# Altium PCB PCB1.PcbDoc
Units mm, origin at the board's own origin, x right, y up, seen from the top; angles counter-clockwise.
Board outline 92.84 x 57.15 mm, 2 copper layers (Top Layer, Bottom Layer), stack 1.571 mm thick; 25 components, 56 nets, 116 pads, 17 vias.
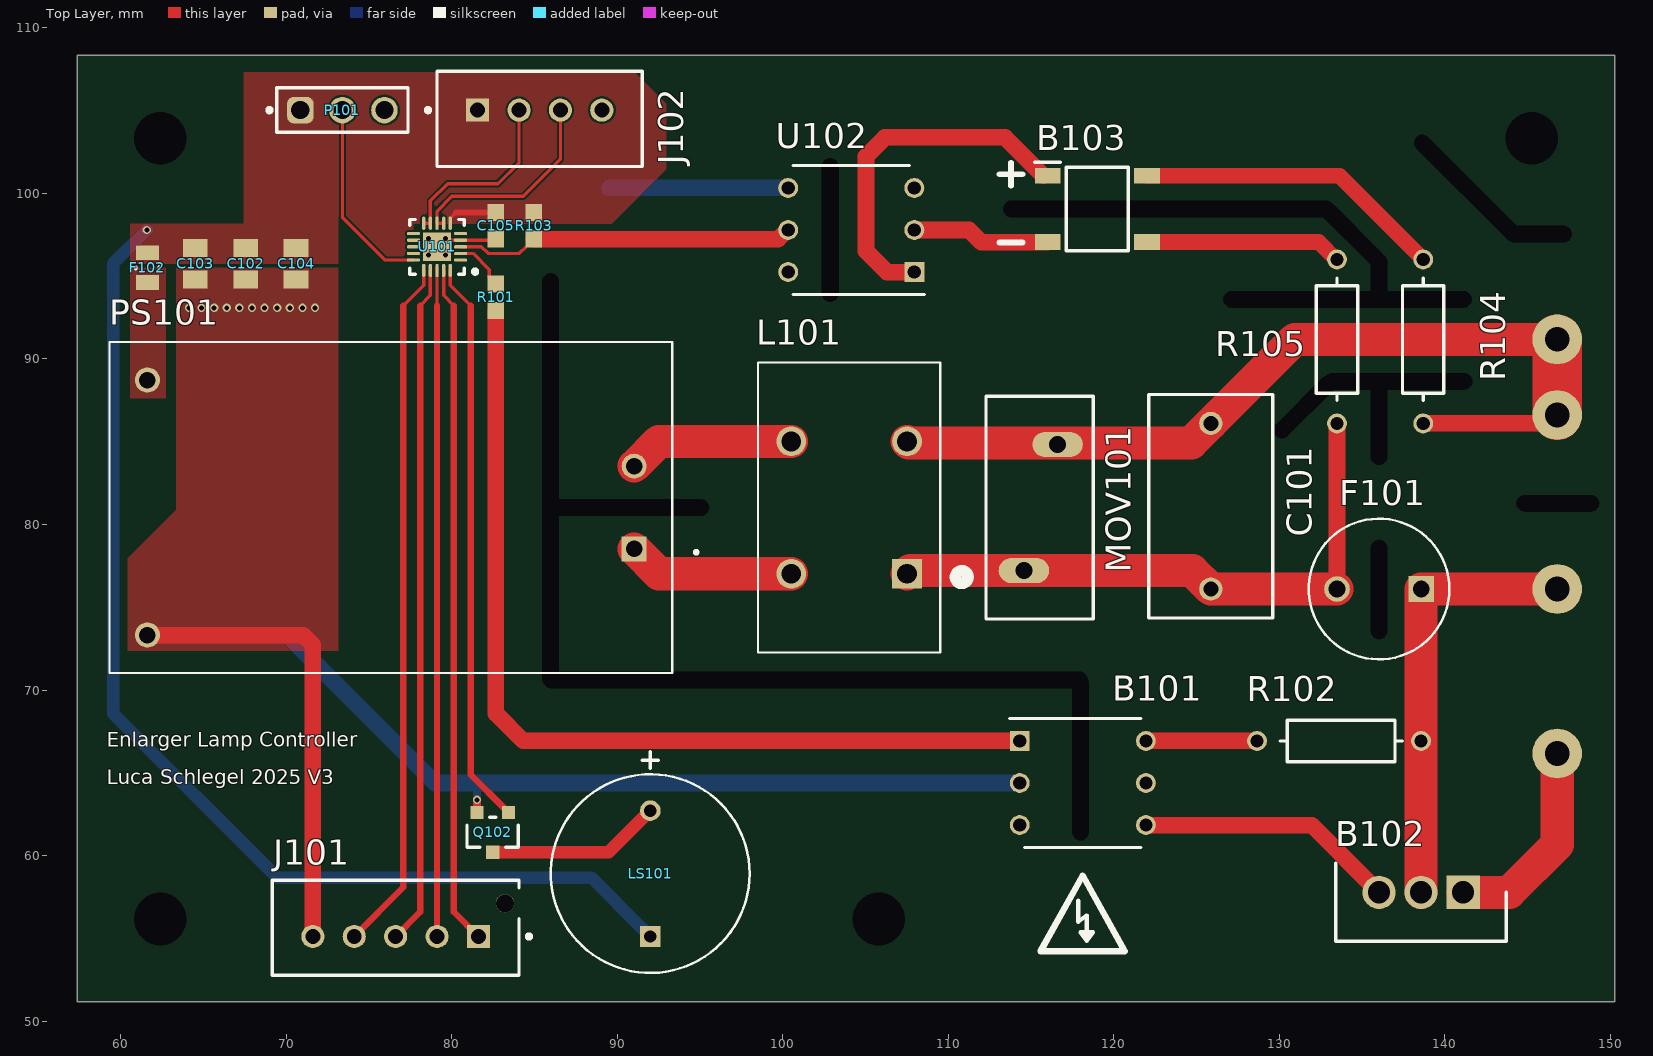
[diagram p0: Top Layer view]
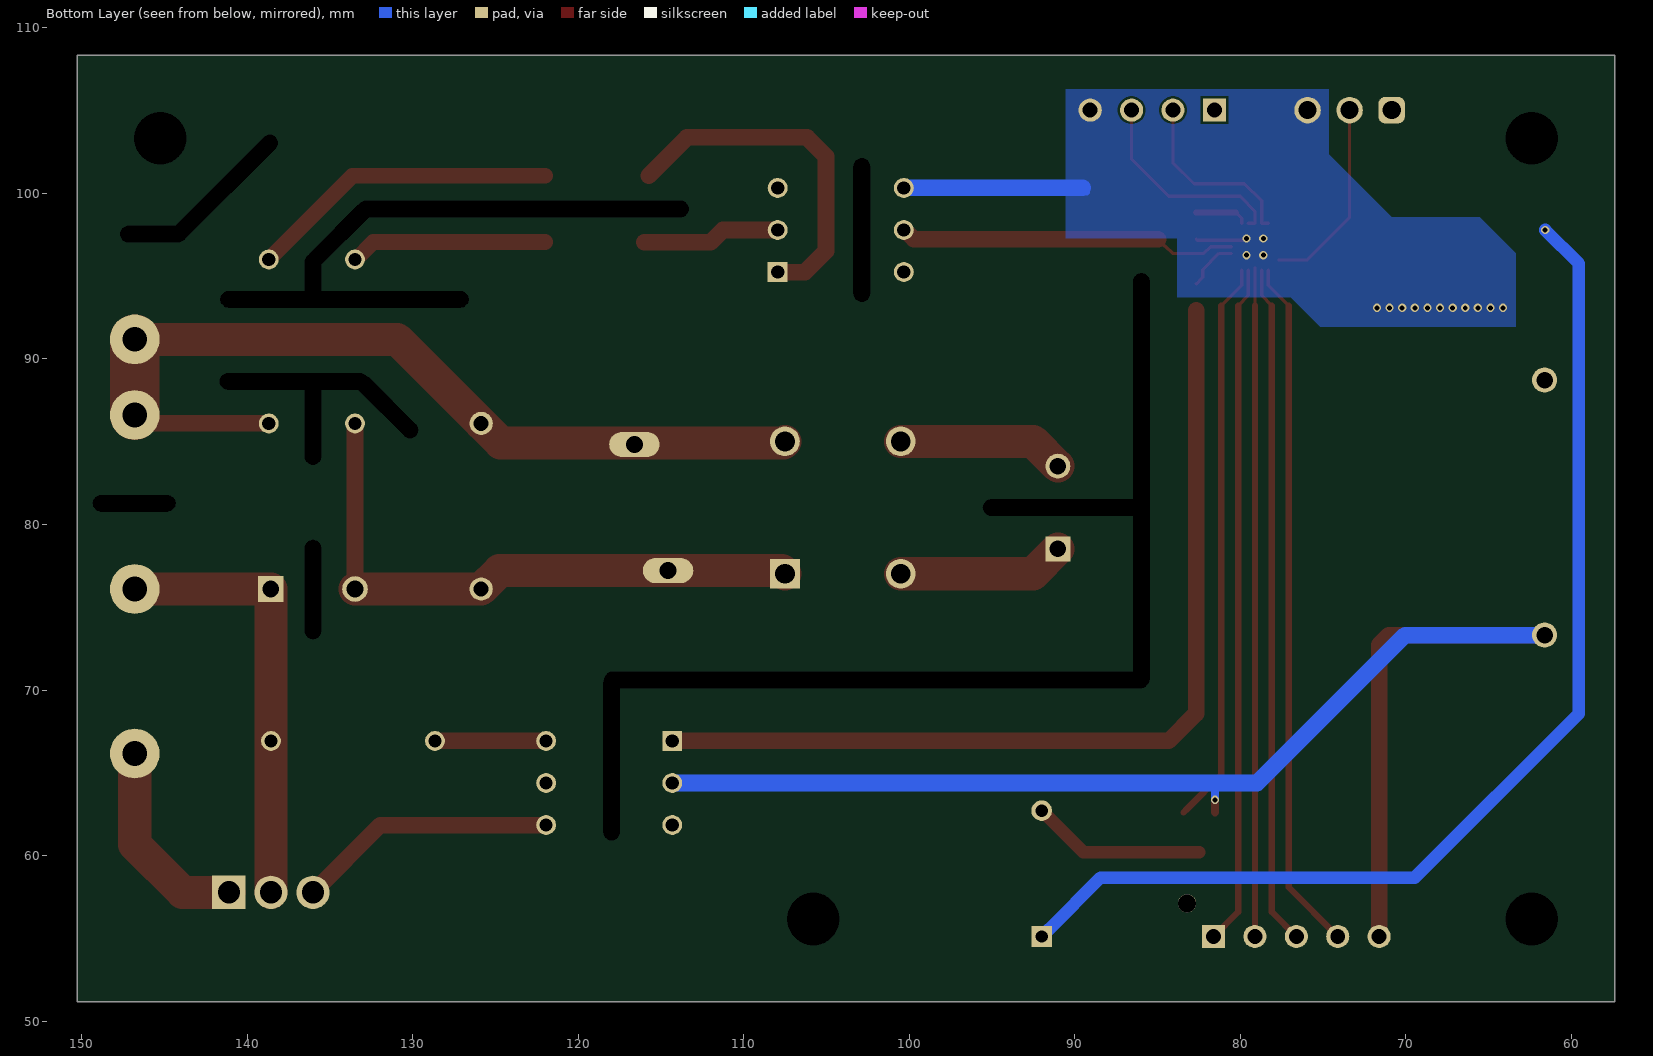
[diagram p1: Bottom Layer view, seen from below]
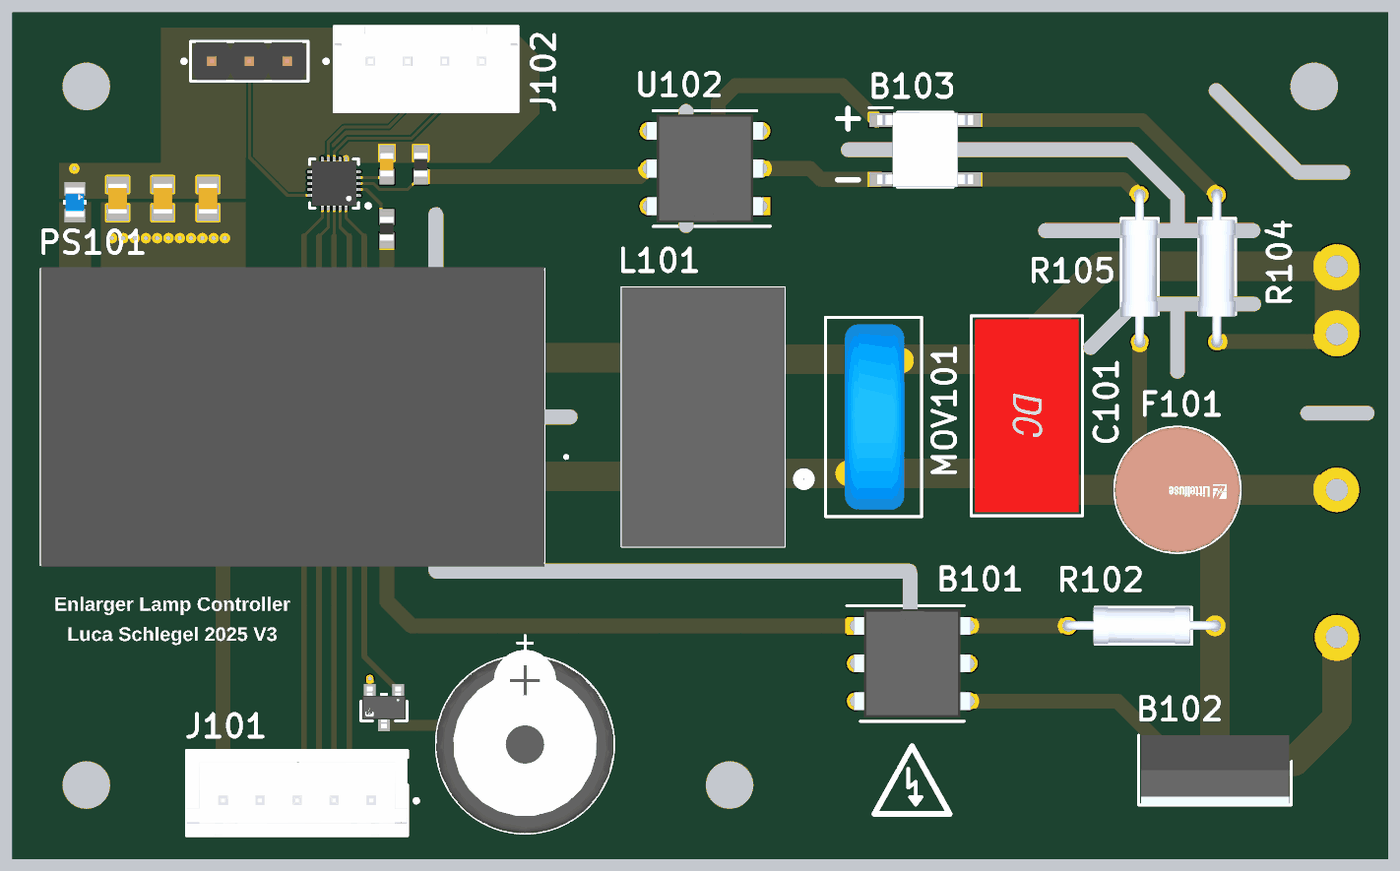
[diagram p2: 3D render of the assembled board from above, using the file's embedded part models]

## Layer stack, top to bottom
Top Solder: solder mask 0.0102, Solder Resist, Dk 3.5
Top Layer: signal copper 0.0356
Dielectric 1: dielectric 1.5, FR-4, Dk 4.8
Bottom Layer: signal copper 0.0356
Bottom Solder: solder mask 0.0102, Solder Resist, Dk 3.5

## Board outline
57.404,51.181 57.404,108.331 150.241,108.331 150.241,51.181

## Design rules (kind name [scope] priority, off if disabled: settings)
Clearance [All] p1: gap=0.127 ignorepadtopadclearanceinfootprint=TRUE except(0.254: Arc-Hole Track-Hole SMDPad-Hole THPad-THPad THPad-Hole Via-Via Via-Hole Fill-Hole Poly-Hole Region-Hole Text-Hole)
PolygonConnect [All] p1: connectstyle=Direct reliefconductorwidth=0.254 reliefentries=4 polygonreliefangle="90 Angle" airgapwidth=0.254
RoutingVias [All] p1: holewidth=0.3 width=0.5 viastyle="Through Hole" minholewidth=0.3 minwidth=0.5 maxholewidth=2539.975 maxwidth=2539.975
SolderMaskExpansion SolderMaskExpansion_VIA [isVia] p1: expansion=-100 istentingtop=FALSE
SolderMaskExpansion [All] p2: expansion=0.102 istentingtop=FALSE
Width [All] p1: maxlimit=254 minlimit=0.127 preferedwidth=0.254
30 further rules are at their usual default settings.

## Components (designator, comment, footprint, x,y, rotation, side; value= is the part's Value field where it differs from the comment)
B101 "MOC3021" MOC3021 118.125,64.389 r0 top
B102 "BT137-600E_127" TO254P470X1000X2000-3P 141.097,57.785 r180 top
B103 "ABS10M-13" SOP400P660X140-4N 118.999,99.06 r0 top
C101 "890324023023" WCAP-FTX2_L13W7H13 125.857,81.106 r270 top
C102 "Capacitor" CAPC2013X13N 67.564,95.758 r90 top value=1p
C103 "Capacitor" CAPC2013X13N 64.516,95.758 r90 top value=1p
C104 "Capacitor" CAPC2013X13N 70.612,95.758 r90 top value=1p
C105 "Capacitor" CAPC1608X09N 82.677,98.044 r90 top value=1p
F101 "37013150000" FP-370-MFG 136.017,76.106 r180 top
F102 "MFU0805FF00500P100" FP-MFU0805-MFG 61.627,95.515 r90 top
J101 "B5B-XH-AM(LF)(SN)" FP-B5B-XH-AM_LF_SN-MFG 76.621,55.643 r0 top
J102 "B4B-XH-A(LF)(SN)" FP-B4B-XH-A_LF_SN-MFG 85.324,104.504 r180 top
L101 "BU9-103R25BL" IND_BU9-103R25BL 104.013,81.026 r90 top
LS101 "MCKPX-G1203A-K4056" FP-MCKPX-G1203A-K4056-MFG 92,58.918 r90 top locked
MOV101 "MOV" MOV-10D561 115.586,81.026 r180 top
P101 "61300311121" 61300311121 73.406,105.029 r0 top
PS101 "HLK-PM03" HLK-PM03 76.327,81.026 r180 top
Q102 "AO3400A" FP-SOT23-MFG 82.484,61.411 r270 top
R101 "Resistor" RESC1608X06N 82.677,93.726 r90 top
R102 "Resistor 1/2W" RESAD1650W60L650D250 128.651,66.929 r0 top
R103 "Resistor" RESC1608X06N 84.963,98.044 r90 top
R104 "Resistor 1/2W" RESAD1650W60L650D250 138.684,86.106 r90 top
R105 "Resistor 1/2W" RESAD1650W60L650D250 133.477,86.106 r90 top
U101 "CH32V003" QFN40P300X300X75_HS-21N 79.121,96.774 r180 top
U102 "Optocoupler, Phototransistor Output, with Base Connection" MOC3021 104.14,97.79 r180 top

## Footprints (in the part's own frame and the unit in brackets; to place one, negate y for a bottom-side part, rotate by r counter-clockwise, add the part's x,y. Pads: shape width x height; smd on the part's side, far side on the other; paste and mask are expansions set on the pad)
61300311121 [mm] "Pin Header, pitch 2.54 mm, THT, Vertical, single row, 3p"
  rrect50% 1.6x1.6 hole 1.1: 1(-2.54,0)
  round 1.6 hole 1.1: 2(0,0) 3(2.54,0)
  silkscreen extent -4.53,-1.35 3.96,1.35, body extent -3.81,-1.27 3.81,1.27, height 8.57
CAPC1608X09N [mm] "Chip Capacitor, 2-Leads, Body 1,55x0,85mm, IPC Medium Density"
  rect 1.05x1 smd: 1(-0.8,0) 2(0.8,0)
  body extent -0.8,-0.45 0.8,0.45, height 0.9
CAPC2013X13N [mm] "Chip Capacitor, 2-Leads, Body 2,03x1,27mm, IPC Medium Density"
  rect 1.1x1.5 smd: 1(-0.95,0) 2(0.95,0)
  body extent -1.01,-0.64 1.01,0.64, height 1.27
FP-370-MFG [mm]
  rect 1.55x1.55 hole 1 paste-2539.97 mask+0: 1(-2.54,0)
  round 1.55 hole 1 paste-2539.97 mask+0: 2(2.54,0)
  silkscreen extent -4.25,-4.25 4.25,4.25, body extent -4.35,-4.35 4.35,4.35, height 0.25
FP-B4B-XH-A_LF_SN-MFG [mm]
  rect 1.4x1.4 hole 0.9 paste-2539.97 mask+0: 1(3.75,-0.525)
  round 1.4 hole 0.9 paste-2539.97 mask+0: 2(1.25,-0.525) 3(-1.25,-0.525) 4(-3.75,-0.525)
  silkscreen extent -6.2,-2.88 6.87,2.88, body extent -6.3,-2.98 6.3,2.98, height 0.25
FP-B5B-XH-AM_LF_SN-MFG [mm]
  rect 1.4x1.4 hole 0.9 paste-2539.97 mask+0: 1(5,-0.525)
  round 1.4 hole 0.9 paste-2539.97 mask+0: 2(2.5,-0.525) 3(0,-0.525) 4(-2.5,-0.525) 5(-5,-0.525)
  round 1.1 hole 1.1 unplated paste-2539.97 mask+0: ""(6.6,1.475)
  silkscreen extent -7.45,-2.88 8.18,2.88, body extent -7.55,-2.98 7.55,2.98, height 0.25
FP-MCKPX-G1203A-K4056-MFG [mm]
  rect 1.25x1.25 hole 0.75 paste-2539.97 mask+0: 1(-3.8,0)
  round 1.25 hole 0.75 paste-2539.97 mask+0: 2(3.8,0)
  silkscreen extent -6,-6 7.35,6, body extent -6.1,-6.1 6.1,6.1, height 0.25
FP-MFU0805-MFG [mm]
  rect 0.9x1.4 smd paste+0 mask+0: 1(-0.9,0) 2(0.9,0)
  silkscreen extent -0.08,-0.7 0.08,0.7, body extent -1.45,-0.8 1.45,0.8, height 0.25
FP-SOT23-MFG [mm]
  rect 0.8x0.8 smd paste+0 mask+0: 1(-1.2,0.95) 2(-1.2,-0.95) 3(1.2,0)
  silkscreen extent -0.9,-1.55 0.9,1.55, body extent -1.7,-1.78 1.7,1.78, height 0.25
HLK-PM03 [mm]
  rect 1.508x1.508 / inner round 1.508 / far side rect 1.508x1.508 hole 1: 1(-14.7,2.5)
  round 1.508 hole 1: 2(-14.7,-2.5) 3(14.7,7.7) 4(14.7,-7.7)
  silkscreen extent -18.55,-10 17,10, body extent -17,-10.1 17,10.1, height 16
IND_BU9-103R25BL [mm]
  rect 1.8x1.8 / inner round 1.8 / far side rect 1.8x1.8 hole 1.2: 1(-4,-3.5)
  round 1.8 hole 1.2: 2(-4,3.5) 3(4,3.5) 4(4,-3.5)
  silkscreen extent -8.75,-7.22 8.75,5.5, body extent -8.76,-5.5 8.74,5.5, height 17.1
MOC3021 [mm]
  rect 1.2x1.2 / inner round 1.2 / far side rect 1.2x1.2 hole 0.8: 1(-3.81,2.54)
  round 1.2 hole 0.8: 2(-3.81,0) 3(-3.81,-2.54) 4(3.81,-2.54) 5(3.81,0) 6(3.81,2.54)
  silkscreen extent -4.41,-3.9 3.5,3.9, body extent -3.96,-3.65 3.96,3.65, height 4.5
MOV-10D561 [mil]
  oval 120x60 hole 40: 1(-40,-150) 2(40,150)
  silkscreen extent -125,-265 130,265, body extent -79,-246 79,246, height 610
QFN40P300X300X75_HS-21N [mm] "QFN, 20-Leads, Body 3,00x3,00mm, Pitch 0,40mm, Thermal Pad 1,70x1,70mm, IPC Medium Density"
  rect 1.7x1.7 smd: 0(0,0)
  oval 0.8x0.2 smd: 1(-1.425,0.8) 2(-1.425,0.4) 3(-1.425,0) 4(-1.425,-0.4) 5(-1.425,-0.8) 11(1.425,-0.8) 12(1.425,-0.4) 13(1.425,0) 14(1.425,0.4) 15(1.425,0.8)
  oval 0.2x0.8 smd: 6(-0.8,-1.425) 7(-0.4,-1.425) 8(0,-1.425) 9(0.4,-1.425) 10(0.8,-1.425) 16(0.8,1.425) 17(0.4,1.425) 18(0,1.425) 19(-0.4,1.425) 20(-0.8,1.425)
  silkscreen extent -2.43,-1.65 1.65,1.65, body extent -1.53,-1.53 1.53,1.53, height 0.75
RESAD1650W60L650D250 [mm]
  round 1.2 hole 0.8: 1(0,0) 2(9.906,0)
  silkscreen extent 1.4,-1.25 8.76,1.25, body extent -0.35,-1.23 10.25,1.27, height 3.24
RESC1608X06N [mm] "Chip Resistor, 2-Leads, Body 1,55x0,85mm, IPC Medium Density"
  rect 1.05x1 smd: 1(-0.8,0) 2(0.8,0)
  body extent -0.8,-0.45 0.8,0.45, height 0.6
SOP400P660X140-4N [mm]
  rect 1.55x0.95 smd: 1(-3,2) 2(3,2) 3(-3,-2) 4(3,-2)
  silkscreen extent -3.77,-2.52 1.88,2.83, body extent -3.22,-2.5 3.22,2.5, height 1.3
TO254P470X1000X2000-3P [mm]
  rect 2.01x2.01 / inner round 2.01 / far side rect 2.01x2.01 hole 1.34: 1(0,0)
  round 2.01 hole 1.34: 2(2.54,0) 3(5.08,0)
  silkscreen extent -2.61,-1.75 7.69,2.95, body extent -2.46,-1.75 7.54,2.95, height 18.64
WCAP-FTX2_L13W7H13 [mm] "Film Capacitors, 13x7x13mm"
  round 1.4 hole 0.9: 1(-5,0) 2(5,0)
  silkscreen extent -6.75,-3.75 6.75,3.75, body extent -6.5,-3.5 6.5,3.5, height 13.05

## Part data
B101: "Optocoupler Triac Output, 400V, DIP6 Lite-On MOC3021 Triac Output Optocoupler, Through Hole, 6-Pin PDIP", Manufacturer_Name=Lite-On, Mouser Part Number=859-MOC3021, Arrow Part Number=MOC3021, Arrow Price/Stock=https://www.arrow.com/en/products/moc3021/lite-on-technology?region=nac, Datasheet Link=https://datasheet.datasheetarchive.com/originals/distributors/Datasheets-17/DSA-323139.pdf, Geometry.Height=4.5mm, Manufacturer_Part_Number=MOC3021, Mouser Price/Stock=https://www.mouser.co.uk/ProductDetail/Lite-On/MOC3021?qs=%2F3Qg3%252BjSQfNbQyAt8MJ%2FPw%3D%3D
B102: "BT137-600E,127 8A, 600V, TRIAC, Gate Trigger 1.5V 25mA, 3-pin, Through Hole, TO-220AB WeEn Semiconductors Co., Ltd", Arrow Part Number=BT137-600E,127, Manufacturer_Name="WeEn Semiconductors", Mouser Part Number=771-BT137-600E, Arrow Price/Stock=https://www.arrow.com/en/products/bt137-600e127/ween-semiconductors?region=europe, Datasheet Link=http://www.ween-semi.com/sites/default/files/2018-10/bt137-600e.pdf, Geometry.Height=4.7mm, Manufacturer_Part_Number=BT137-600E,127, Mouser Price/Stock=https://www.mouser.co.uk/ProductDetail/WeEn-Semiconductors/BT137-600E127?qs=me8TqzrmIYUZpSeuBf3dRg%3D%3D
B103: "Bridge Rectifier Single Phase Standard 1 kV Surface Mount 4-SOPA (Type WX)", Manufacturer_Name="Diodes Incorporated", Mouser Part Number=621-ABS10M-13, Arrow Part Number=ABS10M-13, Arrow Price/Stock=https://www.arrow.com/en/products/abs10m-13/diodes-incorporated?region=nac, Datasheet Link=https://www.diodes.com//assets/Datasheets/ABS10M.pdf, Geometry.Height=1.4mm, Manufacturer_Part_Number=ABS10M-13, Mouser Price/Stock=https://www.mouser.co.uk/ProductDetail/Diodes-Incorporated/ABS10M-13?qs=Li%252BoUPsLEnu%252B%252BQgAw9E2FA%3D%3D
C101: library part CMP-03913-52220322-2, "890324023023 Film Capacitor, Wcap-Ftx2 Series, 0.1 F, 10%, Pp (Polypropylene), 275 Vac Rohs Compliant: Yes", Capacitance=100nF, Case/Package=Radial, Dielectric=PP, Insulation Resistance=30GΩ, Max Operating Temperature=105°C, Min Operating Temperature=-40°C, Tolerance=10%, Voltage Rating=275V, Dielectric Material=PP, Height=13mm, Height - Seated (Max)=13.4874mm, Hole Diameter=900µm, Lead Pitch=10.0076mm, Length=13mm, Mount="Through Hole", NexarPartId=52220322, Packaging=Bulk, Pin Length=18mm, Pitch=10mm, REACH SVHC=Unknown, RoHS=Compliant, Termination="PC Pins", Voltage Rating (AC)=275V, Voltage Rating (DC)=275V, Width=7mm
C102 C103 C104: library part C0805
C105: library part C0603
F101: library part CMP-08605-000108-1, "FUSE BRD MNT 3.15A 250VAC RADIAL", Case/Package=Radial, Color=Brown, Current Rating=3.15A, Flammability Rating="UL94 V-0", Max Operating Temperature=85°C, Min Operating Temperature=-40°C, Package Quantity=1000, Power Dissipation=950mW, Voltage Rating (AC)=250V, Approvals=VDE, Diameter=8.5mm, Fuse Current=3.15A, Fuse Type="Board Mount (Cartridge Style Excluded)", Height=0.315inch, Lead Free="Lead Free", Length=8mm, Mount="Through Hole", Number of Pins=2, Packaging="Ammo Pack", Radiation Hardening=No, RoHS Compliant=Yes, Series="TR5® 370", Termination=Radial, Voltage Rating (DC)=250V
F102: library part CMP-00030-39591236-1, "MFU0805FF00500P100 Fuse Chip Very Fast Acting 0.5A 32V SMD Solder Pad 0805 Ceramic T/R Automotive UL", Case Code (Imperial)=0805, Case Code (Metric)=2012, Case/Package=SMD/SMT, Current Rating=500mA, Max Operating Temperature=125°C, Min Operating Temperature=-55°C, Resistance=570mΩ, Voltage Rating (DC)=32V, Approvals=UL, Depth=1.25mm, Fuse Current=500mA, Height=457.2µm, Housing Material=Ceramic, Lead Free="Lead Free", Length=2.0066mm, Mount="Surface Mount", NexarPartId=39591236, Number of Pins=2, Packaging=Digi-Reel®, Radiation Hardening=No, REACH SVHC="No SVHC", RoHS=Compliant, Width=1.2446mm, Working Voltage=32V
J101: library part CMP-17439-000304-1, "CONN HEADER VERT 5POS 2.5MM", Color=Green, Contact Resistance=20mR, Flammability Rating="UL94 V-0", Housing Color=White, Insulation Color=Natural, Max Current Rating=3A, Max Operating Temperature=85°C, Max Voltage Rating (AC)=250V, Min Operating Temperature=-25°C, Connector Type=Header, Contact Finish - Mating=TIN, Contact Material=Brass, Contact Plating=Copper, Contact Shape=Square, Contact Type="Male Pin", Depth=5.75mm, Fastening Type=Detent, Housing Material=Polyamide, Insulation Material=Nylon, Lead Free="Lead Free", Length=14.9mm, Mated Stacking Heights=9.8mm, Mount="Through Hole", Number of Positions=5, Number of Rows=1, Orientation=Straight, Packaging=Bulk, Pitch=2.5mm, Series=XH, Termination=Solder, Voltage Rating=250V
J102: library part CMP-17439-000250-1, "CONN HEADER VERT 4POS 2.5MM", Color=Natural, Contact Resistance=20mR, Current Rating=3A, Flammability Rating="UL94 V-0", Housing Color=White, Insulation Resistance=1GR, Max Operating Temperature=85°C, Max Voltage Rating (AC)=250V, Min Operating Temperature=-25°C, Package Quantity=500, Connector Type=Header, Contact Finish - Mating=TIN, Contact Material=Brass, Contact Plating=Tin, Contact Shape=Square, Contact Type="Male Pin", Depth=5.75mm, Fastening Type=Detent, Gender=Male, Housing Material=Polyamide, Insulation Color=Natural, Insulation Material=Nylon, Lead Free="Lead Free", Lead Pitch=2.5mm, Length=12.4mm, Mated Stacking Heights=9.8mm, Material=Polyamide, Max Current Rating=3A, Max Voltage Rating (DC)=250V, Mount="Through Hole", Number of Contacts=4, Number of Positions=4, Number of Rows=1, Orientation=Straight, Packaging=Bulk, Pitch=2.5mm, REACH SVHC="No SVHC", Series=XH, Termination=Solder, Voltage Rating=250V, Voltage Rating (AC)=250V, Wire/Cable Gauge=22AWG
L101: "Common mode choke, power line, RoHS", Package=None, Availability=Unavailable, MP=BU9-103R25BL, Price=None
LS101: library part CMP-12433-000001-1, "MAGNETIC BUZZER AND TRANSDUCER - More Details", Current=30mA, Frequency=2300Hz, Manufacturer="Multicomp Pro", Max Supply Voltage=5V, Min Supply Voltage=2V, Operating Supply Voltage=3V, Package=0, Temperature="-20°C to +70°C", Temperature Range High=+70°C, Temperature Range Low=-20°C, Automotive=No, Category=Speak, ComponentLink2Description=Datasheet, ComponentLink2URL=http://www.farnell.com/datasheets/1498149.pdf?_ga=2.17855225.1157923166.1572356775-536200964.1569240579, Device Class L1=Electromechanical, Device Class L2="Audio Products", Device Class L3=Buzzers, Height=9.5mm, Lead Free=Yes, Manufacturer Part Number=MCKPX-G1203A-K4056, Octopart=https://octopart.com/mckpx-g1203a-k4056-multicomp-12157154, RoHS=TRUE, Standoff Height=0.5mm
P101: library part CMP-1502-01062-3, Color=Black, Contact Resistance=20mΩ, Current Rating=3A, Max Operating Temperature=105°C, Min Operating Temperature=-40°C, Operating Supply Voltage=250V, Connector Type="Male Pin", Contact Material=Copper, Contact Mating Length=5.9944mm, Contact Plating=Gold, Gender=Male, Height=8.94mm, Lead Free="Lead Free", Lead Pitch=2.54mm, Mount="Through Hole", NexarPartId=32855521, Number of Contacts=3, Number of Pins=3, Number of Positions=3, Number of Rows=1, Orientation=Vertical, Packaging=Bulk, Pitch=2.54mm, REACH SVHC=Unknown, RoHS=Compliant, Termination=Solder, Voltage Rating=250V
PS101: Package=Package, Availability="Not in stock", Check_prices=https://www.snapeda.com/parts/HLK-PM03/Hi-link/view-part/?ref=eda, MF=Hi-link, MP=HLK-PM03, Price=None, SnapEDA_Link=https://www.snapeda.com/parts/HLK-PM03/Hi-link/view-part/?ref=snap
Q102: library part CMP-83955-000006-1, "MOSFET N-CH 30V 5.7A SOT23", Case/Package=SOT-23, Continuous Drain Current (ID)=5.7A, Drain to Source Voltage (Vdss)=30V, Gate to Source Voltage (Vgs)=12V, Input Capacitance=630pF, Max Operating Temperature=150°C, Max Power Dissipation=1.4W, Min Operating Temperature=-55°C, Lead Free="Lead Free", Mount="Surface Mount", Number of Elements=1, Number of Pins=3, Packaging="Tape and Reel", Power Dissipation=1.4W, Radiation Hardening=No, Rds On Max=26.5mR
R101 R103: library part R0603
R102: library part R_DIP, "Resistor"
R104 R105: library part R_DIP, "30k"
U101: library part CH32V003F4U6, "CH32V003 series is an industrial-grade general-purpose microcontroller designed based on QingKe RISC-V2A / core, which supports 48MHz system main frequency in the product function"
U102: library part 4N25

## Free pads (board coordinates)
  round 3 hole 1.5: 56(146.779,86.614) 56(146.779,91.186) 57(146.779,66.167) 57(146.779,76.106)
  round 0 hole 1 slot 25 at 90 deg: 58(85.979,82.677)
  round 0 hole 1 slot 10 at 0 deg: 58(90.551,81.026)
  round 0 hole 1 slot 32.9 at 0 deg: 58(101.981,70.612)
  round 0 hole 1 slot 8.7 at 90 deg: 58(102.87,97.79)
  round 0 hole 1 slot 10 at 90 deg: 58(117.983,65.913)
  round 0 hole 1 slot 20 at 0 deg: 58(123.317,99.06)
  round 0 hole 1 slot 5 at 45 deg: 58(131.572,87.122)
  round 0 hole 1 slot 15 at 0 deg: 58(134.112,93.599)
  round 0 hole 1 slot 5 at 135 deg: 58(134.366,97.536)
  round 0 hole 1 slot 6 at 90 deg: 58(136.017,76.073)
  round 0 hole 1 slot 5 at 90 deg: 58(136.017,86.106)
  round 0 hole 1 slot 3 at 90 deg: 58(136.017,94.869)
  round 0 hole 1 slot 9 at 0 deg: 58(137.16,88.646)
  round 0 hole 1 slot 8.7 at 135 deg: 58(141.351,100.33)
  round 0 hole 1 slot 4 at 0 deg: 58(145.669,97.536)
  round 0 hole 1 slot 5 at 0 deg: 58(146.812,81.28)
  round 0 hole 3.2: 59(105.8,56.181) 60(145.241,103.331) 61(62.404,103.331) 62(62.404,56.181)

## Via types
v1: diameter 0.5, hole 0.3, Top Layer to Bottom Layer, 17 vias

## Nets (pads, with @x,y where several pads share a name; then routed paths per layer and width w, separated by ;. In a path a pad name is that pad's centre, name@x,y a point inside that pad or via, vN(x,y) a via of type N, cw(c..) or ccw(c..) an arc to the next point about the centre after c; other vN are vias at no path point)
3V3: C102.2 C103.2 C104.2 C105.2 F102.2 J102.1 LS101.1 P101.1 R103.2 U101.6 | length 71.3
  Top Layer w0.2: U101.6 79.921,98.499 80.266,98.844
  Top Layer w0.381: 80.266,98.844 C105.2
  Bottom Layer w0.762: v1(61.595,97.79) 59.563,95.758 59.563,68.58 69.469,58.674 88.444,58.674 91.565,55.553 LS101.1
A: 
AC_L: B102.2 F101.1 pad.57@146.779,76.106 R102.2 | length 26.5
  Top Layer w2: B102.2 R102.2 F101.1 pad.57@146.779,76.106
B: 
Buzzer: Q102.1 U101.20 | length 34.2
  Top Layer w0.2: U101.20 79.921,94.45 81.153,93.218
  Top Layer w0.381: 81.153,93.218 81.153,64.892 83.224,62.821 Q102.1
C: 
D: 
DIG1: 
DIG2: 
DIG3: 
DIG4: 
DP: 
E: 
F: 
G: 
G_DIG1: 
G_DIG2: 
G_DIG3: 
G_DIG4: 
GND: B101.2 C102.1 C103.1 C104.1 C105.1 J101.5 J102.4 P101.3 PS101.3 Q102.2 U101.0 U101.4 U102.4 | length 100
  Top Layer w0.2: U101.0@79.883,97.174 U101.4 82.607,97.174 C105.1
  Top Layer w0.508: Q102.2 v1(81.534,63.373)
  Top Layer w1: PS101.3 71.035,73.326 71.621,72.74 J101.5
  Bottom Layer w0.381: 89.281,100.076 89.535,100.33
  Bottom Layer w0.508: v1(81.534,63.373) 81.534,64.389
  Bottom Layer w1: PS101.3 70.057,73.326 78.994,64.389 81.534,64.389 B101.2 ; 89.535,100.33 U102.4
  other v1: 64.135,93.091 64.897,93.091 65.659,93.091 66.421,93.091 67.183,93.091 67.945,93.091 68.707,93.091 69.469,93.091 70.231,93.091 70.993,93.091 71.755,93.091 78.613,96.266 79.629,96.266 78.613,97.282 79.629,97.282
L: C101.2 F101.2 L101.1 MOV101.2 R105.1 | length 36.5
  Top Layer w1: F101.2 R105.1
  Top Layer w2: L101.1 107.703,77.216 MOV101.2 124.747,77.216 C101.2 F101.2
L_SW: B102.1 pad.57@146.779,66.167 | length 12.4
  Top Layer w2: B102.1 143.891,57.785 146.779,60.673 pad.57@146.779,66.167
N: C101.1 L101.4 MOV101.1 pad.56 R104.1 | length 54.1
  Top Layer w1: R104.1 pad.56@146.271,86.106
  Top Layer w2: L101.4 107.608,84.931 116.602,84.931 124.682,84.931 C101.1 130.937,91.186 pad.56@146.779,91.186
  Top Layer w3: pad.56@146.779,86.614 pad.56@146.779,91.186
NetB101_1: B101.1 R101.1 | length 56.8
  Top Layer w1: R101.1@82.677,92.951 82.677,68.58 84.328,66.929 B101.1@114.398,66.929
NetB101_4: B101.4 B102.3 | length 15.7
  Top Layer w1: B101.4@122.047,61.849 131.953,61.849 B102.3
NetB101_6: B101.6 R102.1 | length 6.7
  Top Layer w1: B101.6 R102.1
NetB103_1: B103.1 U102.1 | length 21.3
  Top Layer w1: U102.1 106.299,95.25 105.029,96.52 105.029,102.235 106.172,103.378 113.431,103.378 B103.1@115.749,101.06
NetB103_2: B103.2 R104.2 | length 18.8
  Top Layer w0.95: B103.2 133.636,101.06 R104.2
  Top Layer w1: R104.2 R104.2@138.708,95.988
NetB103_3: B103.3 U102.2 | length 8.4
  Top Layer w1: U102.2 111.252,97.79 111.982,97.06 B103.3
NetB103_4: B103.4 R105.2 | length 11.9
  Top Layer w0.95: B103.4 132.375,97.06 R105.2@133.423,96.012
  Top Layer w1: R105.2@133.423,96.012 R105.2
NetD201_1: 
NetD201_2: 
NetD201_3: 
NetD201_4: 
NetD201_5: 
NetD201_7: 
NetD201_10: 
NetD201_11: 
NetF102_1: F102.1 PS101.4
NetJ102_2: J102.2 U101.9 U101.10 | length 11.2
  Top Layer w0.2: U101.10 U101.9 78.721,99.549 79.756,100.584 82.804,100.584 84.074,101.854 J102.2
NetJ102_3: J102.3 U101.7 U101.8 | length 12.8
  Top Layer w0.2: U101.7 U101.8 79.121,98.933 80.01,99.822 84.328,99.822 86.574,102.068 J102.3
NetL101_2: L101.2 PS101.1 | length 10.1
  Top Layer w2: PS101.1 92.527,77.026 L101.2
NetL101_3: L101.3 PS101.2 | length 10.1
  Top Layer w2: PS101.2 92.527,85.026 L101.3
NetLS101_2: LS101.2 Q102.3 | length 10.6
  Top Layer w0.762: Q102.3 89.493,60.211 LS101.2
NetP101_2: P101.2 U101.15 | length 12.1
  Top Layer w0.2: P101.2@73.406,105.255 P101.2 73.406,98.552 75.984,95.974 U101.15
NetP201_2: 
Reset: J101.2 U101.18 | length 40.4
  Top Layer w0.2: 79.121,93.218 U101.18 U101.18@79.121,95.504 ; J101.2@79.272,55.269 J101.2@79.295,55.245
  Top Layer w0.381: J101.2 79.121,93.218
Reset_DB: 
Run/Stop: J101.1 U101.19 | length 41.1
  Top Layer w0.2: U101.19 79.521,93.834 80.137,93.218
  Top Layer w0.381: 80.137,93.218 80.137,56.602 J101.1
Run/Stop_DB: 
SIG_IN: R101.2 U101.2 | length 3.2
  Top Layer w0.2: U101.2 81.299,96.374 82.277,95.396 82.277,94.926 R101.2 R101.2@82.677,94.551
T+: J101.4 U101.16 | length 42
  Top Layer w0.2: 77.089,93.218 78.321,94.45 U101.16
  Top Layer w0.381: J101.4 77.089,58.086 77.089,93.218
T+_DB: 
T-: J101.3 U101.17 | length 41.1
  Top Layer w0.2: 78.105,93.218 78.721,93.834 U101.17
  Top Layer w0.381: J101.3 78.105,56.602 78.105,93.218
T-_DB: 
ZC: R103.1 U101.3 U102.5 | length 20.6
  Top Layer w0.2: U101.3 81.801,96.774 82.201,96.374 84.093,96.374 84.538,96.819 84.563,96.819 84.963,97.219 R103.1
  Top Layer w1: R103.1 99.73,97.244 100.276,97.79 U102.5
pads on no net: B101.3 B101.5 J101. U101.1 U101.5 U101.11 U101.12 U101.13 U101.14 U102.3 U102.6

## Polygon pours and split planes (outlines as drawn)
GND on Top Layer "GND_L-01_P-001" (solid, pour order 2): 60.452,72.39 73.152,72.39 73.152,95.504 63.373,95.504 63.373,80.899 60.452,77.978
3V3 on Top Layer "3V3_L-01_P-001" (solid, pour order 1): 75.971,95.745 73.159,98.582 73.159,95.758 60.579,95.758 60.579,98.171 67.437,98.171 67.437,107.315 91.059,107.315 92.964,105.41 92.964,101.473 89.662,98.171 81.661,98.171 77.696,98.171 77.696,95.758
NetF102_1 on Top Layer "3V3_IN_L-01_P-001" (solid, pour order 0): 60.579,95.504 62.738,95.504 62.738,87.63 60.579,87.63
GND on Bottom Layer "GND_L-01_P-001" (solid, pour order 3): 74.676,102.362 74.676,106.299 90.551,106.299 90.551,97.282 83.82,97.282 83.82,93.726 76.962,93.726 75.184,91.948 63.373,91.948 63.373,96.393 65.532,98.552 70.866,98.552

## Silkscreen, mask and mechanical layers (free items; w line width, h text height)
Top Overlay:
  lines w0.254: 117.856,57.277 117.856,56.007 118.364,56.388 118.364,55.372 ; 118.364,55.372 118.554,55.118 118.173,55.118 118.364,55.372 ; 118.364,55.372 118.745,55.372 118.364,54.864 117.983,55.372 118.364,55.372
  lines w0.35: 113.093,97.028 114.49,97.028 ; 113.093,101.155 114.49,101.155 ; 113.792,100.457 113.792,101.854
  lines w0.381: 115.57,54.229 118.11,58.801 120.65,54.229 115.57,54.229
  text "Enlarger Lamp Controller" at 59.182,66.288 h1.5
  text "Luca Schlegel 2025 V3" at 59.182,64.005 h1.5
Mechanical 1:
  the board outline again, w0.2